# Altium PCB MotorDriverBoard.PcbDoc
Units mm, origin at the board's own origin, x right, y up, seen from the top; angles counter-clockwise.
Board outline 24.13 x 24.13 mm, 2 copper layers (Top Layer, Bottom Layer); 18 components, 22 nets, 76 pads, 26 vias.
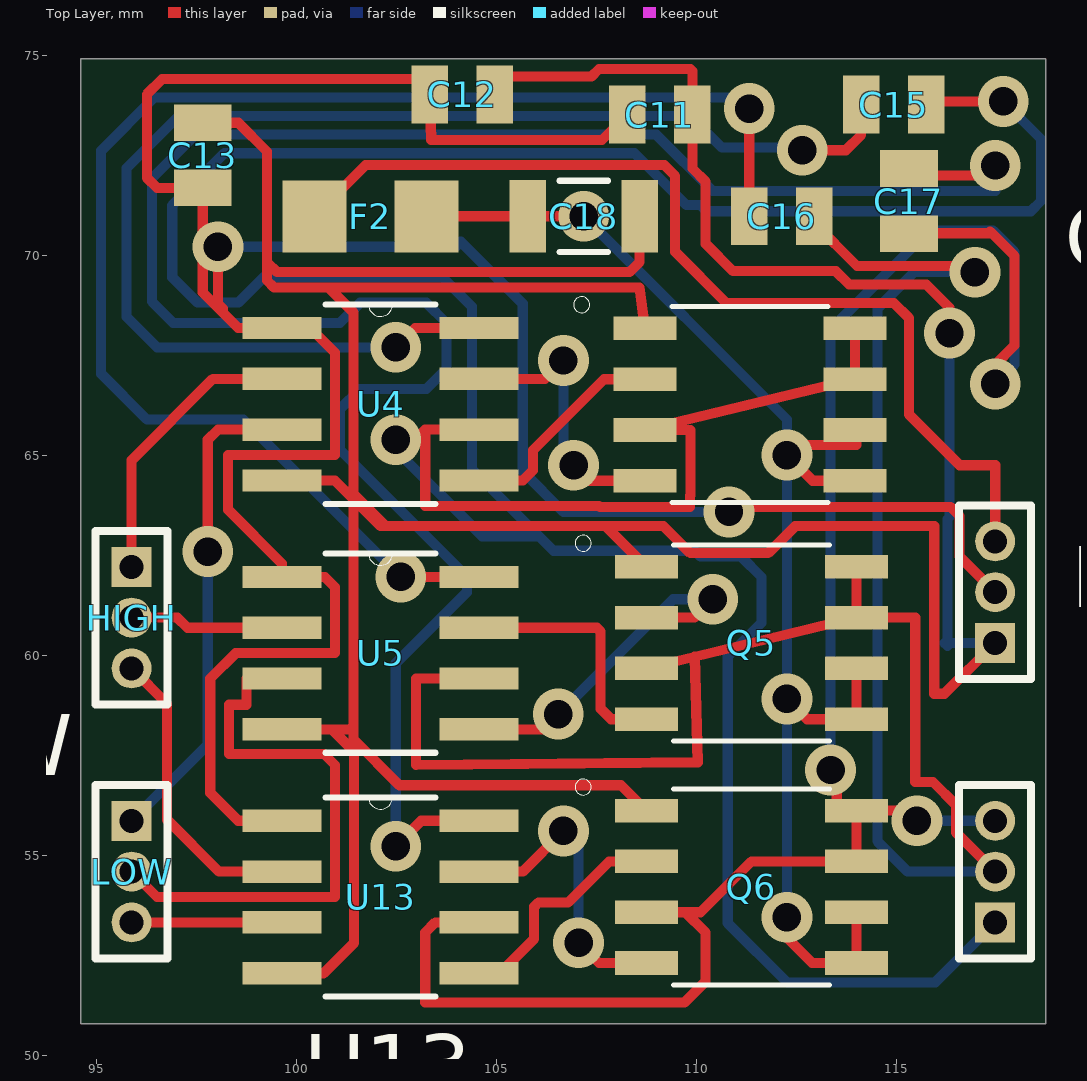
[diagram p0: Top Layer view]
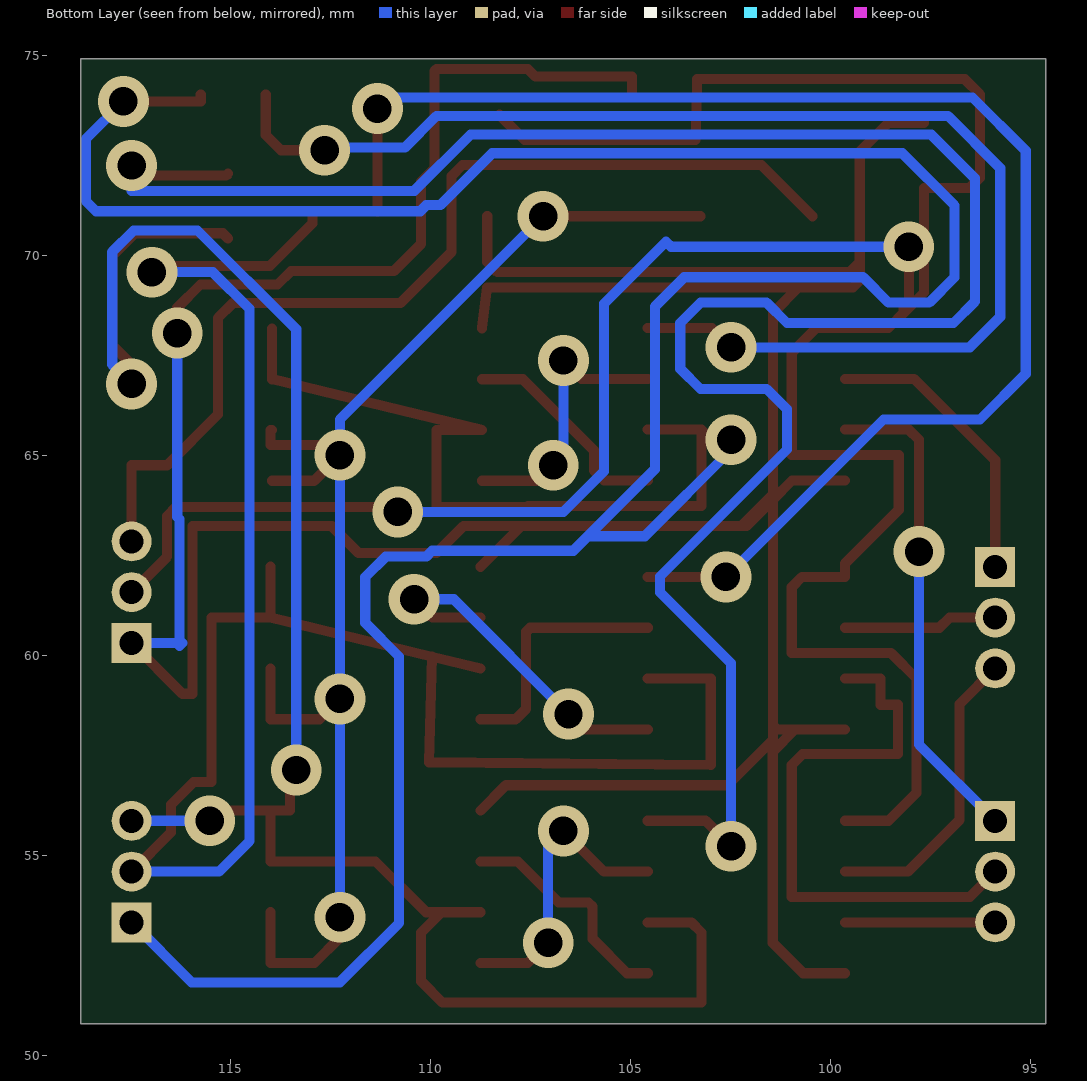
[diagram p1: Bottom Layer view, seen from below]

## Layer stack, top to bottom
Top Solder: solder mask 0.0102, Solder Resist, Dk 3.5
Top Layer: signal copper 0.0356
Dielectric 1: dielectric 0.32, FR-4, Dk 4.8
Bottom Layer: signal copper 0.0356
Bottom Solder: solder mask 0.0102, Solder Resist, Dk 3.5

## Board outline
94.615,74.93 94.615,50.8 118.745,50.8 118.745,74.93

## Design rules (kind name [scope] priority, off if disabled: settings)
Clearance [All] p1: gap=0.21
ComponentClearance [All] p1: gap=0.17 collisioncheckmode=3 verticalgap=0.17 showdistances=FALSE
PolygonConnect [All] p1: connectstyle=Relief reliefconductorwidth=0.254 reliefentries=4 polygonreliefangle="90 Angle" airgapwidth=0.254
RoomDefinition motordriver [InComponentClass('motordriver')] p1: confinementstyle=ConfineIn formatcopy=TRUE lockcomponents=FALSE outline 94.615,50.8 118.745,50.8 118.745,74.93 94.615,74.93
RoutingVias [All] p1: holewidth=0.711 width=1.27 viastyle="Through Hole" minholewidth=0.711 minwidth=1.27 maxholewidth=0.711 maxwidth=1.27
SilkToSilkClearance [All] p1: silktosilkclearance=0.17
SilkToSolderMaskClearance [IsPad] p1: minsilkscreentomaskgap=0.1 clearancetoexposedcopper=TRUE
SolderMaskExpansion [All] p1: expansion=0.102
Width [All] p1: maxlimit=0.254 minlimit=0.254 preferedwidth=0.254
27 further rules are at their usual default settings.

## Components (designator, comment, footprint, x,y, rotation, side; value= is the part's Value field where it differs from the comment)
C11 "100nF" CAPC2013X110N 109.093,73.533 r0 top
C12 "100nF" CAPC2013X110N 104.151,74.041 r180 top
C13 "100nF" CAPC2013X110N 97.663,72.517 r270 top
C15 "100nF" CAPC2013X110N 114.935,73.787 r180 top
C16 "100nF" CAPC2013X110N 112.141,70.993 r0 top
C17 "100nF" CAPC2013X110N 115.316,71.374 r270 top
C18 "10uF" CAPC3216X100N 107.188,70.993 r0 top
F2 "5AFast" 1206 101.854,70.993 r180 top
HIGH "MHDR1X3" MHDR1X3 95.885,62.23 r270 top
LOW "MHDR1X3" MHDR1X3 95.885,55.88 r270 top
P4 "MHDR1X3" MHDR1X3 117.475,60.325 r90 top
PHASE "MHDR1X3" MHDR1X3 117.475,53.34 r90 top
Q4 "Ao4882" SOIC127P490X600X175-8N 111.342,66.285 r0 top
Q5 "Ao4882" SOIC127P490X600X175-8N 111.379,60.325 r0 top
Q6 "Ao4882" SOIC127P490X600X175-8N 111.379,54.229 r0 top
U4 "LM5107MAX/NOPB" SOIC127P620X175-8N 102.108,66.294 r0 top
U5 "LM5107MAX/NOPB" SOIC127P620X175-8N 102.108,60.071 r0 top
U13 "LM5107MAX/NOPB" SOIC127P620X175-8N 102.108,53.975 r0 top

## Footprints (in the part's own frame and the unit in brackets; to place one, negate y for a bottom-side part, rotate by r counter-clockwise, add the part's x,y. Pads: shape width x height; smd on the part's side, far side on the other; paste and mask are expansions set on the pad)
1206 [mm]
  rect 1.6x1.8 smd: Fusein(-1.4,0) Fuseout(1.4,0)
CAPC2013X110N [mil]
  rect 36x57 smd: 1(-32,0) 2(32,0)
CAPC3216X100N [mil]
  rect 36x71 smd: In(-55,0) Out(55,0)
  silkscreen extent -24,-35 24,35
MHDR1X3 [mm] "Connector; Header; 3 Position"
  rect 1x1 hole 0.6: 1(0,0)
  round 1 hole 0.6: 2(1.27,0) 3(2.54,0)
  silkscreen extent -0.9,-0.9 3.44,0.9
SOIC127P490X600X175-8N [mm]
  rect 1.58x0.59 smd: D1(2.625,-1.905) D1A(2.625,-0.635) D2(2.625,1.905) D2A(2.625,0.635) G1(-2.625,-1.905) G2(-2.625,0.635) S1(-2.625,-0.635) S2(-2.625,1.905)
  silkscreen extent -4.4,-2.45 1.95,2.69
SOIC127P620X175-8N [mil]
  rect 78x22 smd: 1(-97,75) 2(-97,25) 3(-97,-25) 4(-97,-75) 5(97,-75) 6(97,-25) 7(97,25) 8(97,75)
  silkscreen extent -54,-98 54,99

## Part data
C11 C12 C13 C15 C16 C17: library part C0805C104K5RACTU, "Capacitor; Ceramic; Cap; .100UF ; Tol+-10%; SMD; Vol-Rtg 50V; X7R, Tape/Reel"
C18: library part Component_1
F2: library part 5AFast1206
HIGH LOW P4 PHASE: "Header, 3-Pin"
U4 U5 U13: "MOSFET DRVR 1.4A 2-OUT Hi/Lo Side Full Brdg/Half Brdg Non-Inv 8-Pin SOIC N T/R"

## Via types
v1: diameter 1.27, hole 0.711, Top Layer to Bottom Layer, 26 vias

## Nets (pads, with @x,y where several pads share a name; then routed paths per layer and width w, separated by ;. In a path a pad name is that pad's centre, name@x,y a point inside that pad or via, vN(x,y) a via of type N, cw(c..) or ccw(c..) an arc to the next point about the centre after c; other vN are vias at no path point)
9V: C11.1 C12.2 C13.2 P4.2 U4.1 U5.1 U13.1 | length 72.2
  Top Layer w0.254: v1(98.044,70.231) 98.044,68.809 98.171,68.682 98.12,68.631 ; U13.1 98.552,55.88 97.853,56.579 97.853,59.436 98.488,60.071 100.972,60.071 100.972,61.722 100.718,61.976 U5.1 99.644,62.306 98.298,63.652 98.298,65.024 100.972,65.024 100.972,67.583 100.355,68.199 U4.1 98.552,68.199 98.12,68.631 ; C11.1 107.645,72.898 103.378,72.898 C12.2 103.338,74.422 96.647,74.422 96.266,74.041 96.266,71.958 96.52,71.704 C13.2 97.663,69.088 98.12,68.631 ; v1(110.82,63.602) 110.947,63.729 116.357,63.729 116.586,63.5 116.586,62.484 P4.2
  Bottom Layer w0.254: v1(98.044,70.231) 103.988,70.231 104.115,70.358 105.664,68.809 105.664,64.618 106.68,63.602 v1(110.82,63.602)
GND: C11.2 C12.1 C13.1 C18.Out P4.1 Q4.S2 Q5.S2 Q6.S2 U4.4 U5.4 U13.4 | length 108.1
  Top Layer w0.254: C13.1 98.552,73.33 99.27,72.612 99.27,69.85 ; U13.4 100.686,52.07 101.448,52.832 101.448,57.607 100.889,58.166 ; U5.4 100.889,58.166 ; U4.4 100.965,64.389 101.436,63.918 ; C12.1 104.964,74.484 107.377,74.484 107.569,74.676 109.855,74.676 109.906,74.625 C11.2 109.906,72.187 110.236,71.857 110.236,70.307 110.922,69.621 113.491,69.621 113.827,69.286 115.753,69.286 116.332,68.707 v1(116.332,68.072) ; C18.Out 108.585,69.85 108.331,69.596 99.524,69.596 99.27,69.85 ; Q4.S2 108.715,68.211 108.585,69.215 100.801,69.215 ; Q6.S2 108.119,56.769 102.579,56.769 101.436,57.912 101.436,58.256 ; Q5.S2 107.738,63.246 ; P4.1 116.205,59.055 115.951,59.055 115.951,63.246 112.473,63.246 111.799,62.572 109.855,62.572 109.181,63.246 107.738,63.246 ; 99.27,69.85 99.27,69.386 99.441,69.215 100.801,69.215 ; 100.801,69.215 101.436,68.58 101.436,64.045 ; 100.889,58.166 101.346,58.166 101.436,58.256 ; 101.436,58.256 101.436,63.918 ; 101.436,63.918 101.436,64.045 ; 101.436,63.918 102.108,63.246 102.235,63.246 ; 101.436,64.045 102.235,63.246 ; 102.235,63.246 107.738,63.246
  Bottom Layer w0.254: v1(116.332,68.072) 116.332,63.475 116.281,63.424 116.281,60.325 ; P4.1 116.281,60.325 ; 116.281,60.325 116.281,60.249 116.205,60.325 116.281,60.325
HB0: C15.2 U4.8 | length 33.5
  Top Layer w0.254: v1(102.489,67.716) 102.972,68.199 U4.8 ; v1(112.649,72.644) 113.741,72.644 114.122,73.025 C15.2 C15.2@114.122,74.041
  Bottom Layer w0.254: v1(102.489,67.716) 96.52,67.716 95.758,68.478 95.758,72.194 97.061,73.498 109.855,73.498 110.644,72.709 112.584,72.709 v1(112.649,72.644)
HB1: C16.1 U5.8 | length 36.6
  Top Layer w0.254: v1(102.616,61.976) U5.8 ; C16.1@111.328,71.12 v1(111.328,73.685)
  Bottom Layer w0.254: v1(102.616,61.976) 98.679,65.913 96.266,65.913 95.123,67.056 95.123,72.634 96.45,73.962 111.052,73.962 v1(111.328,73.685)
HB2: C17.1 U13.8 | length 55.9
  Top Layer w0.254: v1(102.489,55.245) 103.124,55.88 U13.8 ; C17.1@115.062,72.06 115.113,72.009 117.221,72.009 v1(117.475,72.263)
  Bottom Layer w0.254: v1(102.489,55.245) 102.489,59.817 104.267,61.595 104.267,61.986 101.092,65.161 101.092,66.167 101.6,66.675 103.251,66.675 103.759,67.183 103.759,68.326 103.251,68.834 101.6,68.834 101.092,68.326 96.926,68.326 96.393,68.859 96.393,71.945 97.482,73.034 109.002,73.034 110.408,71.628 117.475,71.628 v1(117.475,72.263)
HG0: C15.1 PHASE.1 Q4.D2 Q4.D2A Q4.S1 U4.6 | length 92.6
  Top Layer w0.254: v1(102.489,65.405) 102.972,65.405 103.226,65.659 ; U4.6 103.226,65.659 ; Q4.D2 Q4.D2A 108.754,65.659 Q4.S1 109.855,65.65 109.855,64.011 109.848,64.004 109.848,63.729 107.594,63.729 107.569,63.754 103.226,63.754 103.226,65.659 ; C15.1@115.748,74.041 115.748,73.863 v1(117.678,73.863)
  Bottom Layer w0.254: v1(102.489,65.405) 102.489,65.151 104.648,62.992 106.07,62.992 ; PHASE.1 115.976,51.841 112.268,51.841 110.788,53.321 110.788,59.988 111.633,60.833 111.633,61.976 111.125,62.484 110.109,62.484 109.963,62.63 106.433,62.63 106.07,62.992 ; v1(117.678,73.863) 118.618,72.923 118.618,71.374 118.364,71.12 110.26,71.12 110.108,71.272 109.756,71.272 108.459,72.57 98.205,72.57 96.901,71.266 96.901,69.469 97.536,68.834 98.552,68.834 99.187,69.469 103.657,69.469 104.394,68.732 104.394,64.668 106.07,62.992
HG1: Q5.G1 U5.7 | length 6.3
  Top Layer w0.254: U5.7 107.512,60.706 107.611,60.607 107.611,58.682 107.874,58.42 Q5.G1
HG2: Q6.G1 U13.7 | length 7.4
  Top Layer w0.254: U13.7 105.664,54.61 v1(106.68,55.626) ; v1(107.061,52.832) 107.569,52.324 Q6.G1
  Bottom Layer w0.254: v1(106.68,55.626) 107.061,55.245 v1(107.061,52.832)
HIGH0: HIGH.1 U4.2 | length 7.3
  Top Layer w0.254: HIGH.1 95.885,64.897 97.917,66.929 U4.2
HIGH1: HIGH.2 U5.2 | length 3.9
  Top Layer w0.254: HIGH.2 97.028,60.96 97.282,60.706 U5.2
HIGH2: HIGH.3 U13.2 | length 7.6
  Top Layer w0.254: HIGH.3 96.774,58.801 96.774,55.905 98.069,54.61 U13.2
HV_BATT_F: C18.In F2.Fusein Q4.D1 Q4.D1A Q5.D1 Q5.D1A Q6.D1 Q6.D1A | length 34.7
  Top Layer w0.254: F2.Fusein C18.In v1(107.188,70.993) ; v1(112.268,53.467) 112.268,52.959 112.903,52.324 Q6.D1 Q6.D1A ; v1(112.268,58.928) 112.776,58.42 Q5.D1 Q5.D1A ; v1(112.268,65.024) 112.912,64.38 Q4.D1 ; v1@112.268,65.278 114.004,65.278 114.004,65.65 Q4.D1A
  Bottom Layer w0.254: v1(107.188,70.993) 112.268,65.913 v1(112.268,65.024) v1(112.268,58.928) v1(112.268,53.467)
LG0: Q4.G2 U4.5 | length 5.5
  Top Layer w0.254: U4.5 105.664,64.389 105.918,64.643 105.918,65.142 107.696,66.92 Q4.G2
LG1: Q5.G2 U5.5 | length 9
  Top Layer w0.254: U5.5 106.172,58.166 v1(106.553,58.547) ; Q5.G2 109.957,60.96 v1(110.414,61.417)
  Bottom Layer w0.254: v1(106.553,58.547) 109.423,61.417 v1(110.414,61.417)
LG2: Q6.G2 U13.5 | length 5.8
  Top Layer w0.254: U13.5 105.091,52.07 105.949,52.928 105.949,53.734 106.054,53.839 106.798,53.839 107.823,54.864 Q6.G2
LOW0: LOW.1 U4.3 | length 12.3
  Top Layer w0.254: v1(97.79,62.611) 97.79,65.405 98.044,65.659 U4.3
  Bottom Layer w0.254: LOW.1 97.79,57.785 v1(97.79,62.611)
LOW1: LOW.2 U5.3 | length 14.6
  Top Layer w0.254: LOW.2 96.52,53.975 100.972,53.975 100.972,57.277 100.699,57.55 98.317,57.55 98.317,58.782 98.755,58.782 98.755,59.436 U5.3
LOW2: LOW.3 U13.3 | length 3.8
  Top Layer w0.254: LOW.3 U13.3
NetF2_Fuseout: F2.Fuseout P4.3 | length 25.1
  Top Layer w0.254: F2.Fuseout 101.735,72.274 109.202,72.274 109.474,72.002 109.474,70.104 110.756,68.822 114.947,68.822 115.316,68.453 115.316,66.04 116.586,64.77 117.475,64.77 P4.3
NetQ4_G1: Q4.G1 U4.7 | length 7
  Top Layer w0.254: U4.7 106.221,66.929 v1(106.68,67.388) ; v1(106.934,64.77) 107.324,64.38 Q4.G1
  Bottom Layer w0.254: v1(106.68,67.388) 106.68,65.024 v1(106.934,64.77)
PHASE1: C16.2 PHASE.2 Q5.D2 Q5.D2A Q5.S1 U5.6 | length 53.2
  Top Layer w0.254: U5.6 102.997,59.436 102.997,57.277 110.039,57.344 109.962,59.982 ; Q5.S1 109.962,59.982 ; C16.2@112.954,71.12 C16.2 112.954,70.815 114.019,69.75 116.813,69.75 v1(116.967,69.596) ; Q5.D2 Q5.D2A ; PHASE.2 116.491,55.594 116.491,56.283 115.922,56.852 115.475,56.852 115.475,60.96 Q5.D2A ; 109.962,59.982 Q5.D2A
  Bottom Layer w0.254: v1(116.967,69.596) 115.443,69.596 114.529,68.682 114.529,55.372 115.291,54.61 PHASE.2
PHASE2: C17.2 PHASE.3 Q6.D2 Q6.D2A Q6.S1 U13.6 | length 51.5
  Top Layer w0.254: U13.6 103.48,53.34 103.226,53.086 103.226,51.333 109.703,51.333 110.236,51.867 110.236,53.086 109.728,53.594 ; Q6.S1 109.728,53.594 ; v1(113.36,57.15) 113.513,56.998 113.513,56.134 Q6.D2 ; C17.2@115.062,70.434 115.196,70.568 117.304,70.568 117.348,70.612 117.958,70.002 117.958,67.767 117.475,67.285 v1(117.475,66.802) ; v1(115.519,55.88) 115.265,56.134 Q6.D2 ; 109.728,53.594 110.109,53.594 111.379,54.864 Q6.D2A Q6.D2
  Bottom Layer w0.254: v1(113.36,57.15) 113.36,68.169 115.828,70.637 117.424,70.637 117.958,70.104 117.958,67.285 v1(117.475,66.802) ; v1(115.519,55.88) PHASE.3

## Dimensions
95.25,51.562 to 118.11,50.673 on Top Layer
121.539,52.705 to 121.412,65.405 on Top Layer